# EAGLE board SpringReverbRev2_panel (EAGLE 7.7.0)
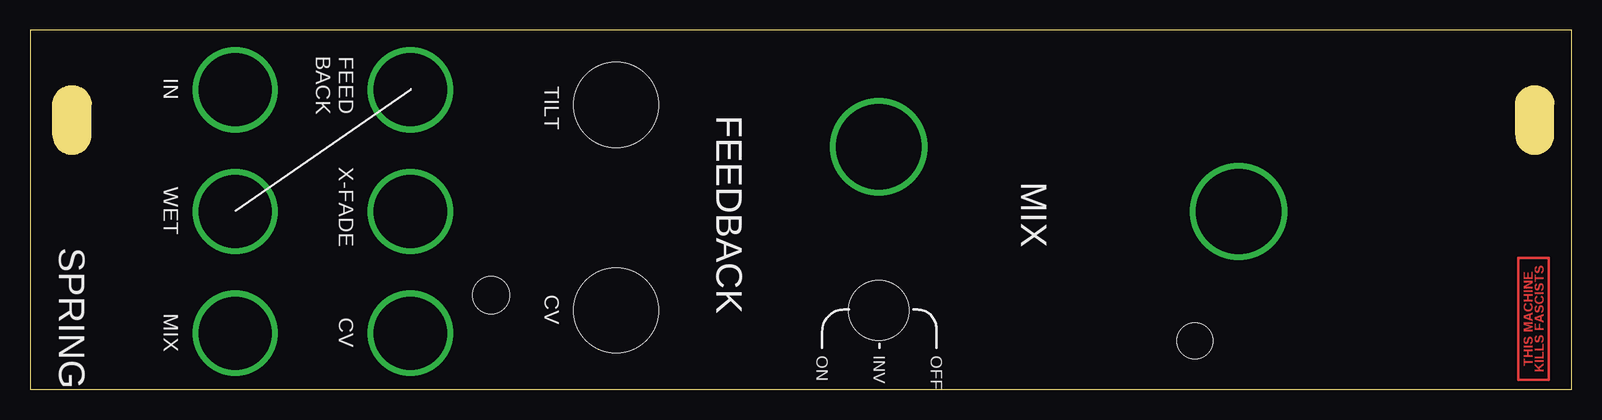
[diagram p0: board, top side]
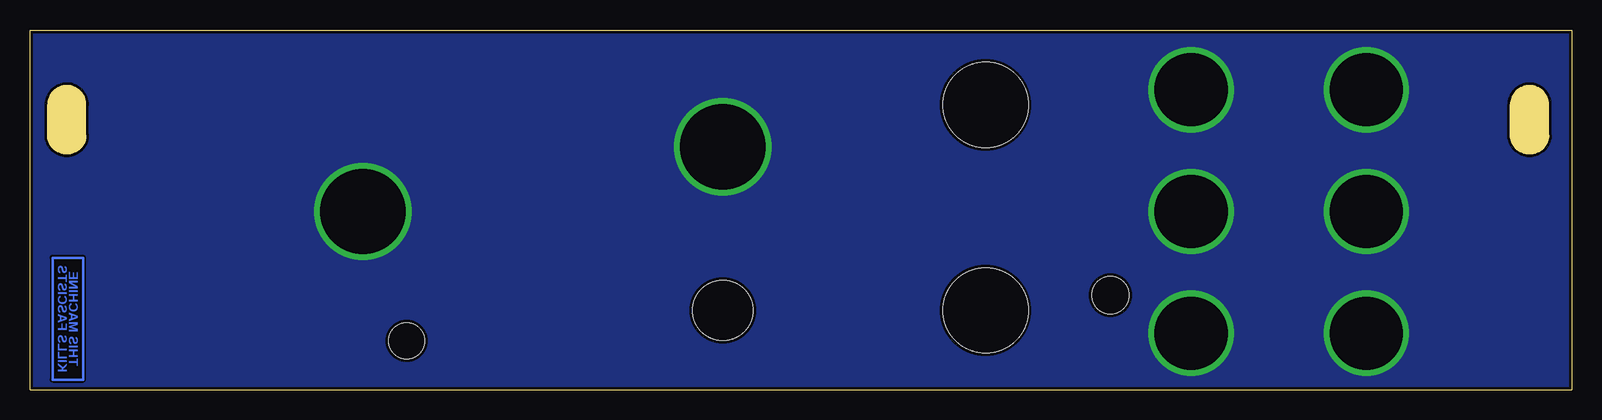
[diagram p1: board, bottom side, seen from below]

Size 128.5 x 30 mm. Coordinates in mm from the lower left corner, seen from the top.
Outline: 128.5,0 128.5,30 0,30 0,0 128.5,0
Copper layers (1*16): Top 0.035mm / dielectric 0.2mm / Bottom 0.035mm
Design rules "SeeedStudio_DRU_no_angle_20130527 *": minimum track width 6mil, minimum drill 12mil, track to track 6mil, track to pad 6mil, pad to pad 6mil, via to via 6mil, smd to smd 0mil, copper to edge 10mil, drill to drill 10mil, minimum pad ring 6mil, minimum via ring 6mil, stop-mask expansion 2mil, vias tented up to drill 25mil, thermal gap 10mil
Net classes: 0 default: width 0.203 mm; 1 power: width 0.406 mm
Holes 3.1 mm at 38.44,7.87
Holes 7.1 mm at 48.85,6.6 48.85,23.75
Holes 3 mm at 97.11,4.06
Holes 5 mm at 70.75,6.6

## Placement (x,y rotation side)
U$1  [SLOT_HOLE]  3.5,22.5 90 top
U$2  [SLOT_HOLE]  125.44,22.5 90 top
U$3  [TMKF]  125.35,5.91 270 top

## Library data of the parts
U$1-U$3 = MusicThingModular

## Tracks (layer width: path | path; a pad name or v marks a point on that pad's centre or on a via)
GND  (via drill 6.1, 7.1)
  other vias: 31.7,4.7 17.1,4.7 31.7,25.02 31.7,14.86 70.75,20.25 100.75,14.86 17.1,25.02 17.1,14.86
  pour Bottom: -0.36,30.09 128.86,30.09 128.86,-0.39 -0.04,-0.7

## Text on the board
tPlace: IN | FEED / BACK | TILT | WET | X-FADE | FEEDBACK | MIX | CV | SPRING | MIX | CV | ON | INV | OFF